# Altium PCB PCB_Audio Output_Dual_Layer.pcbdoc
Units mil, origin at the board's own origin, x right, y up, seen from the top; angles counter-clockwise.
Board outline 3600 x 3660 mil, 2 copper layers (Top Layer, Bottom Layer); 22 components, 13 nets, 84 pads, 0 vias.
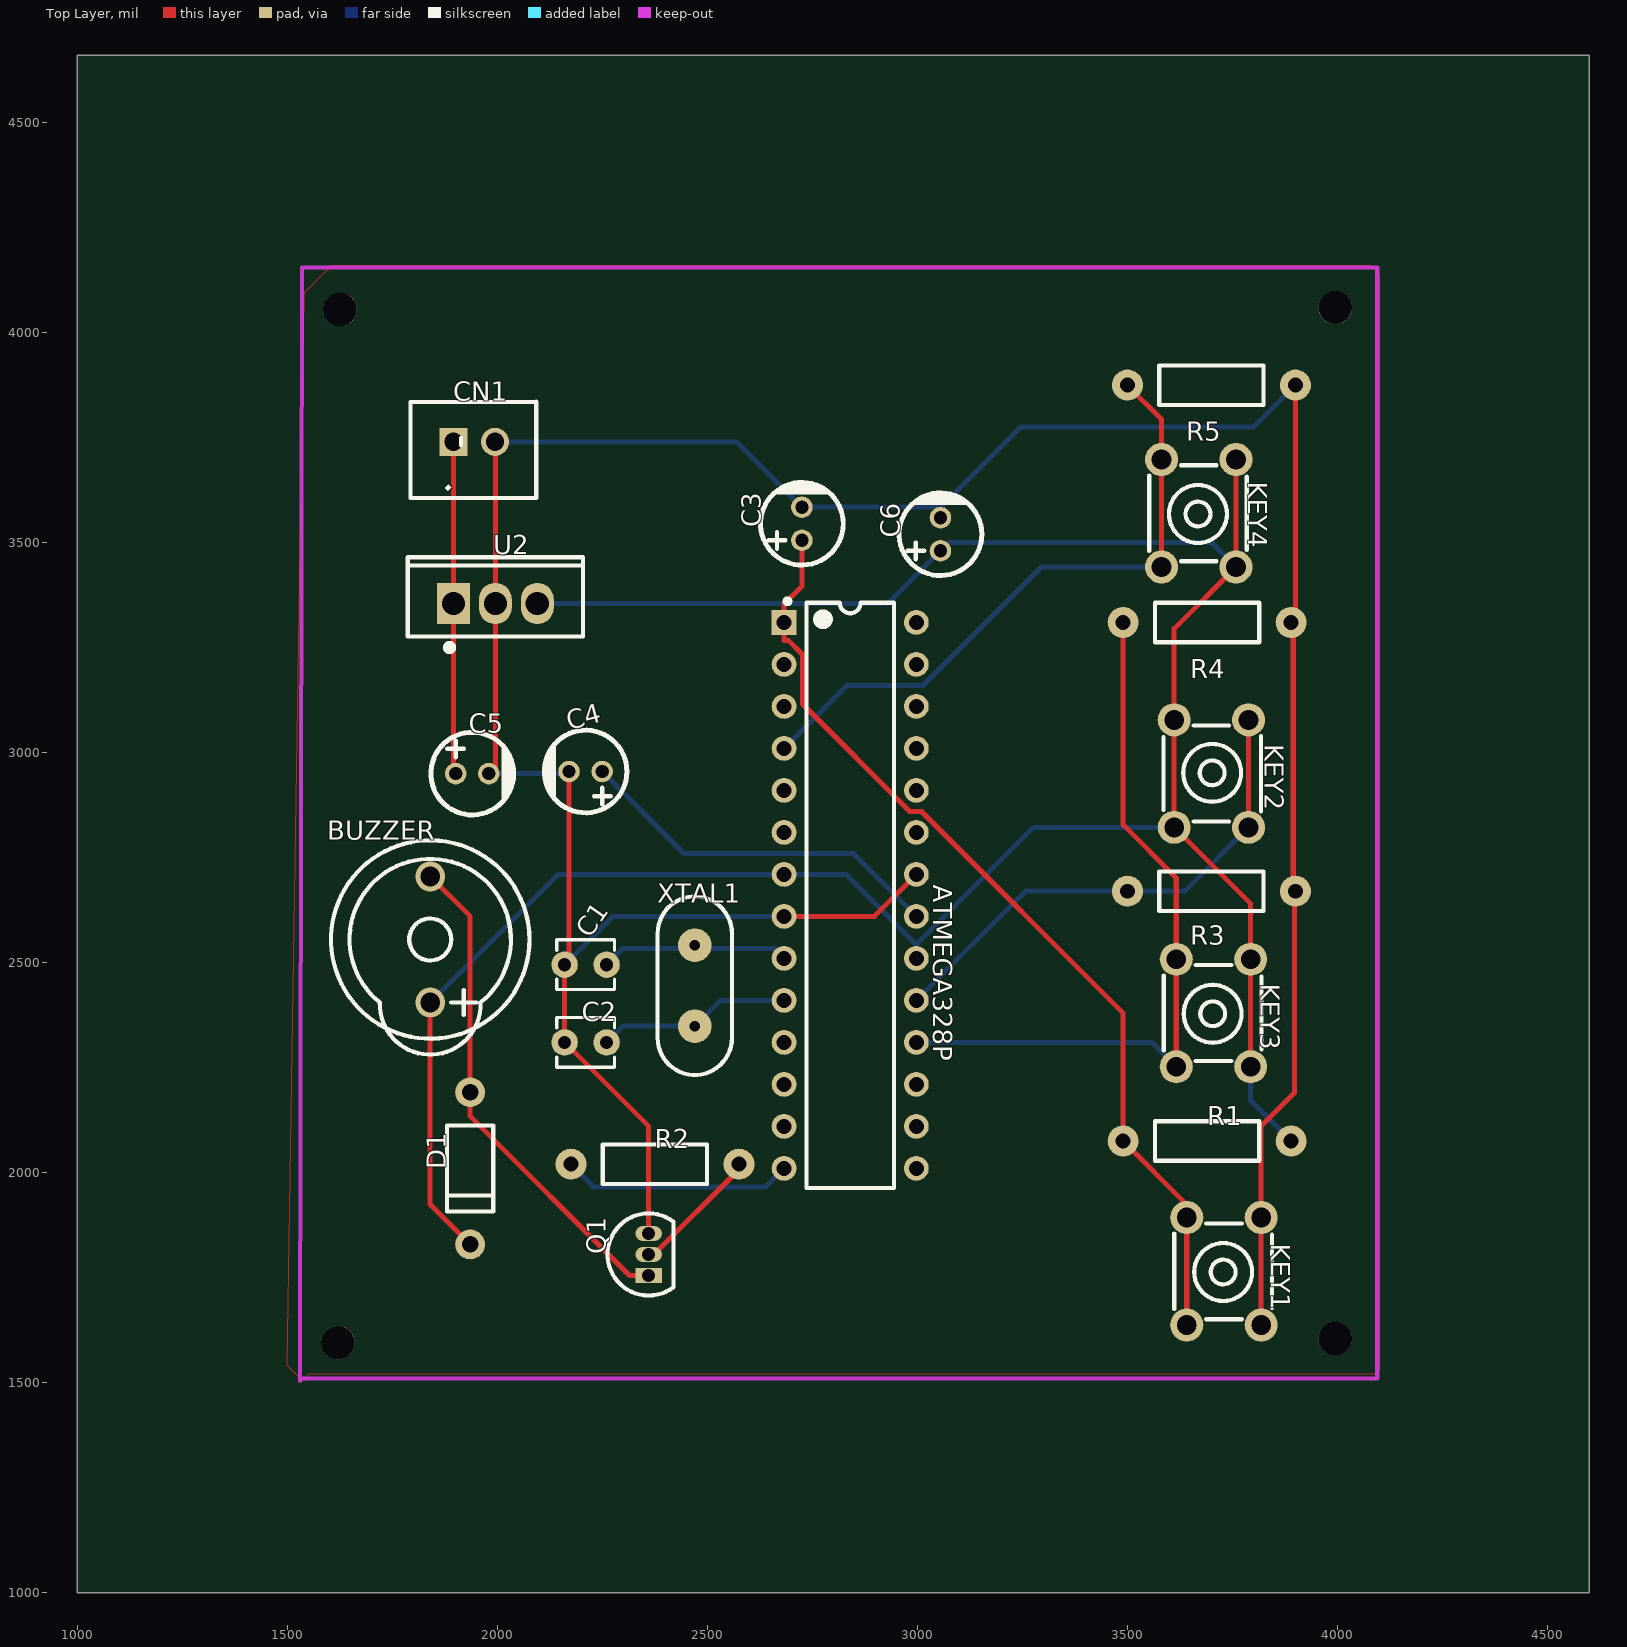
[diagram p0: Top Layer view]
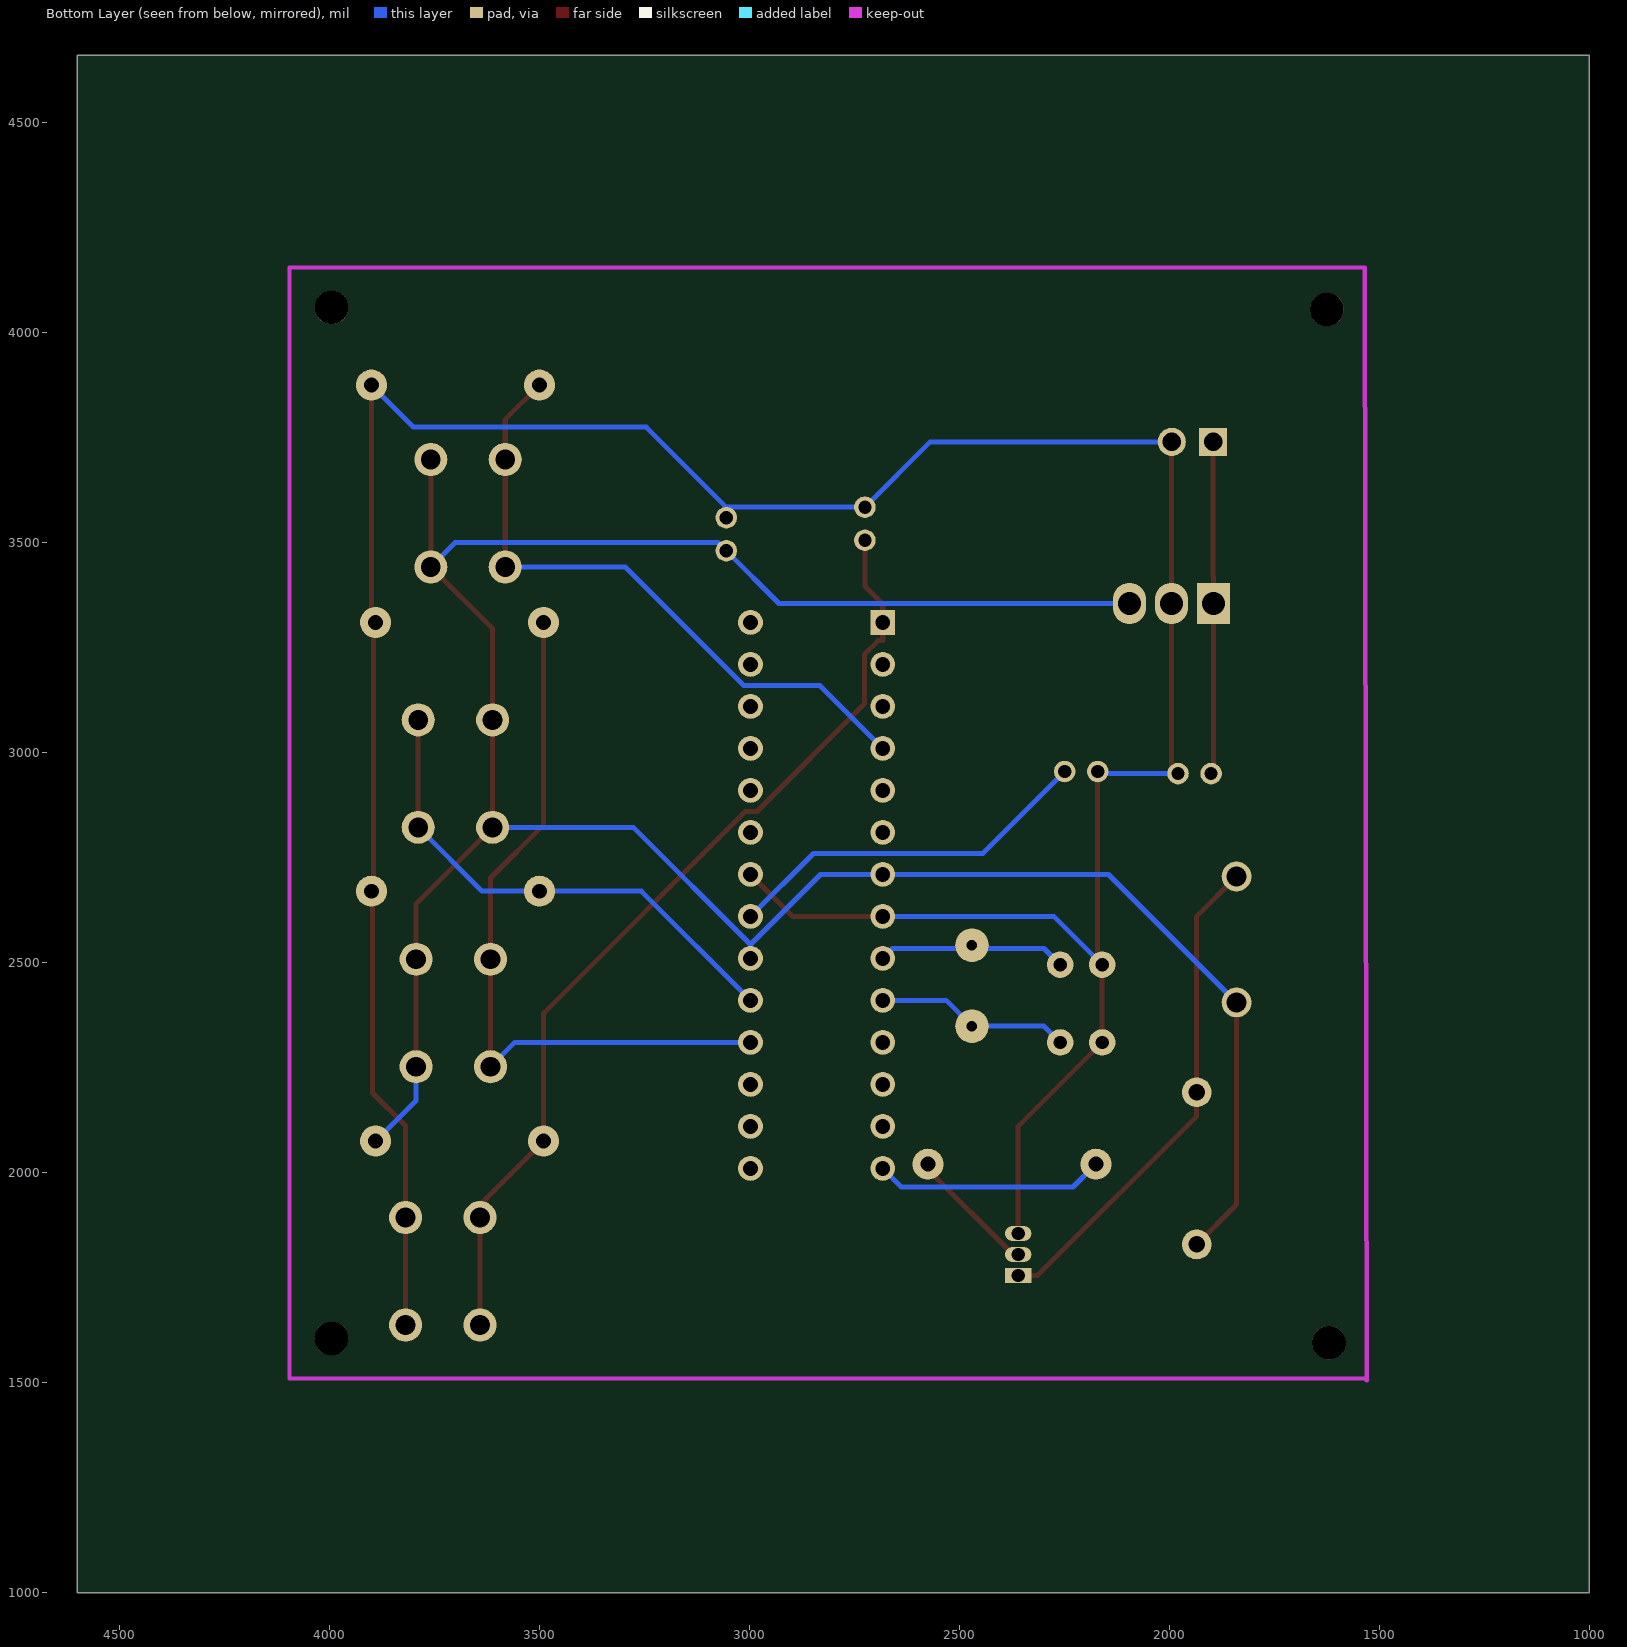
[diagram p1: Bottom Layer view, seen from below]

## Layer stack, top to bottom
Top Layer: signal copper (thickness not stored)
Dielectric: dielectric 12.6, FR-4, Dk 4.8
Bottom Layer: signal copper (thickness not stored)

## Board outline
4600,1000 1000,1000 1000,4660 4600,4660

## Components (designator, comment, footprint, x,y, rotation, side; value= is the part's Value field where it differs from the comment)
ATMEGA328P "ATMEGA _328P-PU" DIP-28_L34.6-W7.3-P2.54-LS10.2-BL 2840,2660 r270 top
BUZZER "5V_BUZZER" DIP-BUZZER-12X6 1840,2555 r180 top
C1 "22pF" CAP-TH_L3.5-W3.0-P2.54-D0.8 2210,2495 r0 top
C2 "22pF" CAP-TH_L3.5-W3.0-P2.54-D0.8 2210,2310 r0 top
C3 "100nF" CAP-TH_BD5.0-P2.00-D0.8-FD 2725,3545 r90 top
C4 "100nF" CAP-TH_BD5.0-P2.00-D0.8-FD 2210,2955 r180 top
C5 "330nF" CAP-TH_BD5.0-P2.00-D0.8-FD 1940,2950 r0 top
C6 "100nF" CAP-TH_BD5.0-P2.00-D0.8-FD 3055,3520 r90 top
CN1 "JST_2 PIN" CONN-TH_XHB-2A 1945,3740 r180 top
D1 "1N4001_Diode" DO-41_BD2.4-L4.7-P8.70-D0.9-RD 1935,2010 r90 top
KEY1 "Reset_Button" KEY-TH_4P-L6.0-W6.0-P4.50 3730,1765 r90 top
KEY2 "PLAY" KEY-TH_4P-L6.0-W6.0-P4.50 3700,2950 r270 top
KEY3 "CHANGE SONG" KEY-TH_4P-L6.0-W6.0-P4.50 3705,2380 r90 top
KEY4 "STOP" KEY-TH_4P-L6.0-W6.0-P4.50 3670,3570 r90 top
Q1 "BC547B_NPN_Transistor" TO-92-3_L4.9-W3.7-P1.27-L 2360,1805 r90 top
R1 "10K" AXIAL-0.4 3690,2075 r0 top
R2 "220Ω" AXIAL-0.4 2375,2020 r0 top
R3 "330Ω" AXIAL-0.4 3700,2670 r180 top
R4 "330Ω" AXIAL-0.4 3690,3310 r180 top
R5 "330Ω" AXIAL-0.4 3700,3875 r180 top
U2 "7805_Regulator" TO-220-3_L10.0-W4.5-P2.54-L 1995,3355 r0 top
XTAL1 "16MHz" "16MHZ_OSC [PCB]" 2470,2445 r0 top

## Footprints (in the part's own frame and the unit in brackets; to place one, negate y for a bottom-side part, rotate by r counter-clockwise, add the part's x,y. Pads: shape width x height; smd on the part's side, far side on the other; paste and mask are expansions set on the pad)
"16MHZ_OSC [PCB]" [mil]
  round 80 hole 25: 1(0,96.46) 2(0,-96.46)
  silkscreen extent -88,-212 88,212
AXIAL-0.4 [mil]
  round 74 hole 35.4: 1(-200,0) 2(200,0)
  silkscreen extent -124,-47 124,47
CAP-TH_BD5.0-P2.00-D0.8-FD [mm]
  round 1.3 hole 0.8: 1(-1,0) 2(1,0)
  silkscreen extent -2.5,-2.5 2.5,2.5
CAP-TH_L3.5-W3.0-P2.54-D0.8 [mm]
  round 1.6 hole 0.8: 1(-1.27,0) 2(1.27,0)
  silkscreen extent -1.75,-1.5 1.75,1.5
CONN-TH_XHB-2A [mm]
  rect 1.7x1.7 hole 1.1: 1(1.251,0)
  round 1.7 hole 1.1: 2(-1.251,0)
  silkscreen extent -3.75,-2.42 3.86,3.4
DIP-28_L34.6-W7.3-P2.54-LS10.2-BL [mm]
  rect 1.5x1.5 hole 0.9: 1(-16.51,-4)
  round 1.5 hole 0.9: 2(-13.97,-4) 3(-11.43,-4) 4(-8.89,-4) 5(-6.35,-4) 6(-3.81,-4) 7(-1.27,-4) 8(1.27,-4) 9(3.81,-4) 10(6.35,-4) 11(8.89,-4) 12(11.43,-4) 13(13.97,-4) 14(16.51,-4) 15(16.51,4) 16(13.97,4) 17(11.43,4) 18(8.89,4) 19(6.35,4) 20(3.81,4) 21(1.27,4) 22(-1.27,4) 23(-3.81,4) 24(-6.35,4) 25(-8.89,4) 26(-11.43,4) 27(-13.97,4) 28(-16.51,4)
  silkscreen extent -17.94,-3.95 17.7,2.65
DIP-BUZZER-12X6 [mm]
  round 1.8 hole 1.2: 1(0,3.81) 2(0,-3.81)
  silkscreen extent -6,-6 6,6.96
DO-41_BD2.4-L4.7-P8.70-D0.9-RD [mm]
  round 1.8 hole 1: 1(-4.6,0) 2(4.6,0)
  silkscreen extent -2.6,-1.4 2.6,1.4
KEY-TH_4P-L6.0-W6.0-P4.50 [mm]
  round 2 hole 1.2: 1(-3.25,-2.25) 2(3.25,-2.25) 3(3.25,2.25) 4(-3.25,2.25)
  silkscreen extent -2.9,-2.9 2.9,3
TO-92-3_L4.9-W3.7-P1.27-L [mm]
  rect 0.9x1.6 hole 0.8: 1(-1.27,0)
  oval 0.9x1.6 hole 0.8: 2(0,0) 3(1.27,0)
  silkscreen extent -2.48,-1.5 2.48,2.48
TO-220-3_L10.0-W4.5-P2.54-L [mm]
  rect 2x2.5 hole 1.4: 1(-2.54,0)
  oval 2x2.5 hole 1.4: 2(0,0) 3(2.54,0)
  silkscreen extent -5.3,-2.86 5.3,2.8

## Free pads (board coordinates)
  round 80 hole 80 unplated: ""(1620,1595) ""(1625,4055) ""(3995,1605) ""(3995,4060)

## Nets (pads, with @x,y where several pads share a name; then routed paths per layer and width w, separated by ;. In a path a pad name is that pad's centre, name@x,y a point inside that pad or via, vN(x,y) a via of type N, cw(c..) or ccw(c..) an arc to the next point about the centre after c; other vN are vias at no path point)
5V: ATMEGA328P.7 ATMEGA328P.20 BUZZER.1 C6.1 D1.1 KEY2.1 KEY2.2 KEY3.1 KEY3.2 KEY4.1 KEY4.2 R1.2 U2.3 | length 6278.1
  Top Layer w12: BUZZER.1 1840,1923.9 D1.1 ; KEY4.2@3758.6,3697.9 KEY4.1 3611.4,3294.9 3611.4,3077.9 KEY2.2 3793.6,2639.9 3793.6,2507.9 KEY3.1
  Bottom Layer w12: BUZZER.1 2145,2710 ATMEGA328P.7 2830.7,2710 2997.5,2543.2 ; U2.3 2929.4,3355 C6.1 3074.5,3500.1 3700.5,3500.1 KEY4.1 ; ATMEGA328P.20 2997.5,2543.2 ; KEY2.2 3276.3,2822 2997.5,2543.2 ; KEY3.1 3793.6,2171.4 R1.2
BUZZER: ATMEGA328P.14 R2.1 | length 548.4
  Bottom Layer w12: R2.1 2229.3,1965.7 2638.3,1965.7 ATMEGA328P.14
BUZZER1_2: BUZZER.2 D1.2 Q1.1 | length 1192.1
  Top Layer w12: BUZZER.2 1935,2610 D1.2 1935,2134.4 2314.4,1755 Q1.1
CHANGE: ATMEGA328P.18 KEY3.3 KEY3.4 R4.2 | length 1753.3
  Top Layer w12: R4.2 3490,2828 3616.4,2701.6 3616.4,2507.9 KEY3.4
  Bottom Layer w12: ATMEGA328P.18 3558.5,2310 KEY3.4
GND: ATMEGA328P.8 ATMEGA328P.22 C1.1 C2.1 C3.2 C4.2 C5.2 C6.2 CN1.2 KEY1.1 KEY1.2 Q1.3 R3.1 R4.1 R5.1 U2.2 | length 7500.6
  Top Layer w12: C5.2 1995,2965.6 U2.2 1995,3739.2 CN1.2@1994.3,3740 ; C4.2 2170.6,2505.6 C1.1 C2.1 2360,2110 Q1.3 ; ATMEGA328P.8 2897.5,2610 ATMEGA328P.22 ; KEY1.1 3818.6,1892.9 3818.6,2110.8 3897.5,2189.7 R3.1@3897.5,2670 ; R4.1 R4.1@3895,3310 ; R3.1 R3.1@3897.5,2670 ; R5.1 3900,3315 R4.1@3895,3310 ; R4.1@3895,3310 3895,2672.5 R3.1@3897.5,2670
  Bottom Layer w12: C5.2 2165.6,2950 C4.2 ; CN1.2@1994.3,3740 2569.4,3740 C3.2 C6.2@3055,3584.4 ; C1.1 2275,2610 ATMEGA328P.8 ; C6.2 C6.2@3055,3584.4 ; R5.1 3799.8,3774.8 3245.4,3774.8 C6.2@3055,3584.4
PLAY: ATMEGA328P.19 KEY2.3 KEY2.4 R3.2 | length 1217.6
  Top Layer w12: KEY2.3 KEY2.4@3788.6,3077.9
  Bottom Layer w12: ATMEGA328P.19 3257.5,2670 R3.2 3636.5,2670 KEY2.3
Q1_2: Q1.2 R2.2 | length 311.4
  Top Layer w12: Q1.2 2372.5,1805 2575,2007.5 R2.2
STOP: ATMEGA328P.4 KEY4.3 KEY4.4 R5.2 | length 1544.6
  Top Layer w12: R5.2 3581.4,3793.6 3581.4,3697.9 KEY4.4
  Bottom Layer w12: ATMEGA328P.4 2832.5,3160 3013.5,3160 3295.5,3442 KEY4.4
U1_1: ATMEGA328P.1 C3.1 KEY1.3 KEY1.4 R1.1 | length 2306.2
  Top Layer w12: C3.1 2725,3396.1 2682.5,3353.6 ATMEGA328P.1 2682.5,3266.4 2693.4,3266.4 2726.2,3233.7 2726.2,3115.6 2981.7,2860 3009.7,2860 3490,2379.6 R1.1 3641.4,1923.6 3641.4,1892.9 KEY1.4
U1_9: ATMEGA328P.9 C1.2 XTAL1.1 | length 456.2
  Bottom Layer w12: C1.2 2298.4,2533.3 XTAL1.1@2470,2533.3 ; XTAL1.1 XTAL1.1@2470,2533.3 ; ATMEGA328P.9 2659.2,2533.3 XTAL1.1@2470,2533.3
U1_10: ATMEGA328P.10 C2.2 XTAL1.2 | length 463.9
  Bottom Layer w12: C2.2 2298.5,2348.5 XTAL1.2 2531.5,2410 ATMEGA328P.10
U1_21: ATMEGA328P.21 C4.1 | length 891
  Bottom Layer w12: C4.1 2444.4,2760 2847.5,2760 ATMEGA328P.21
VCC: C5.1 CN1.1 U2.1 | length 792.7
  Top Layer w12: CN1.1 1895.8,3419.1 1895,3418.3 U2.1 1895,2955.6 C5.1
pads on no net: ATMEGA328P.2 ATMEGA328P.3 ATMEGA328P.5 ATMEGA328P.6 ATMEGA328P.11 ATMEGA328P.12 ATMEGA328P.13 ATMEGA328P.15 ATMEGA328P.16 ATMEGA328P.17 ATMEGA328P.23 ATMEGA328P.24 ATMEGA328P.25 ATMEGA328P.26 ATMEGA328P.27 ATMEGA328P.28

## Polygon pours and split planes (outlines as drawn)
GND on Top Layer (solid): 1540,4085 1540,4095 1605,4160 4080,4160 4100,4140 4100,1530 4090,1520 1550,1520 1530,1500 1530,1510 1500,1540